# EAGLE board TouScruino-v0 (EAGLE 6.3)
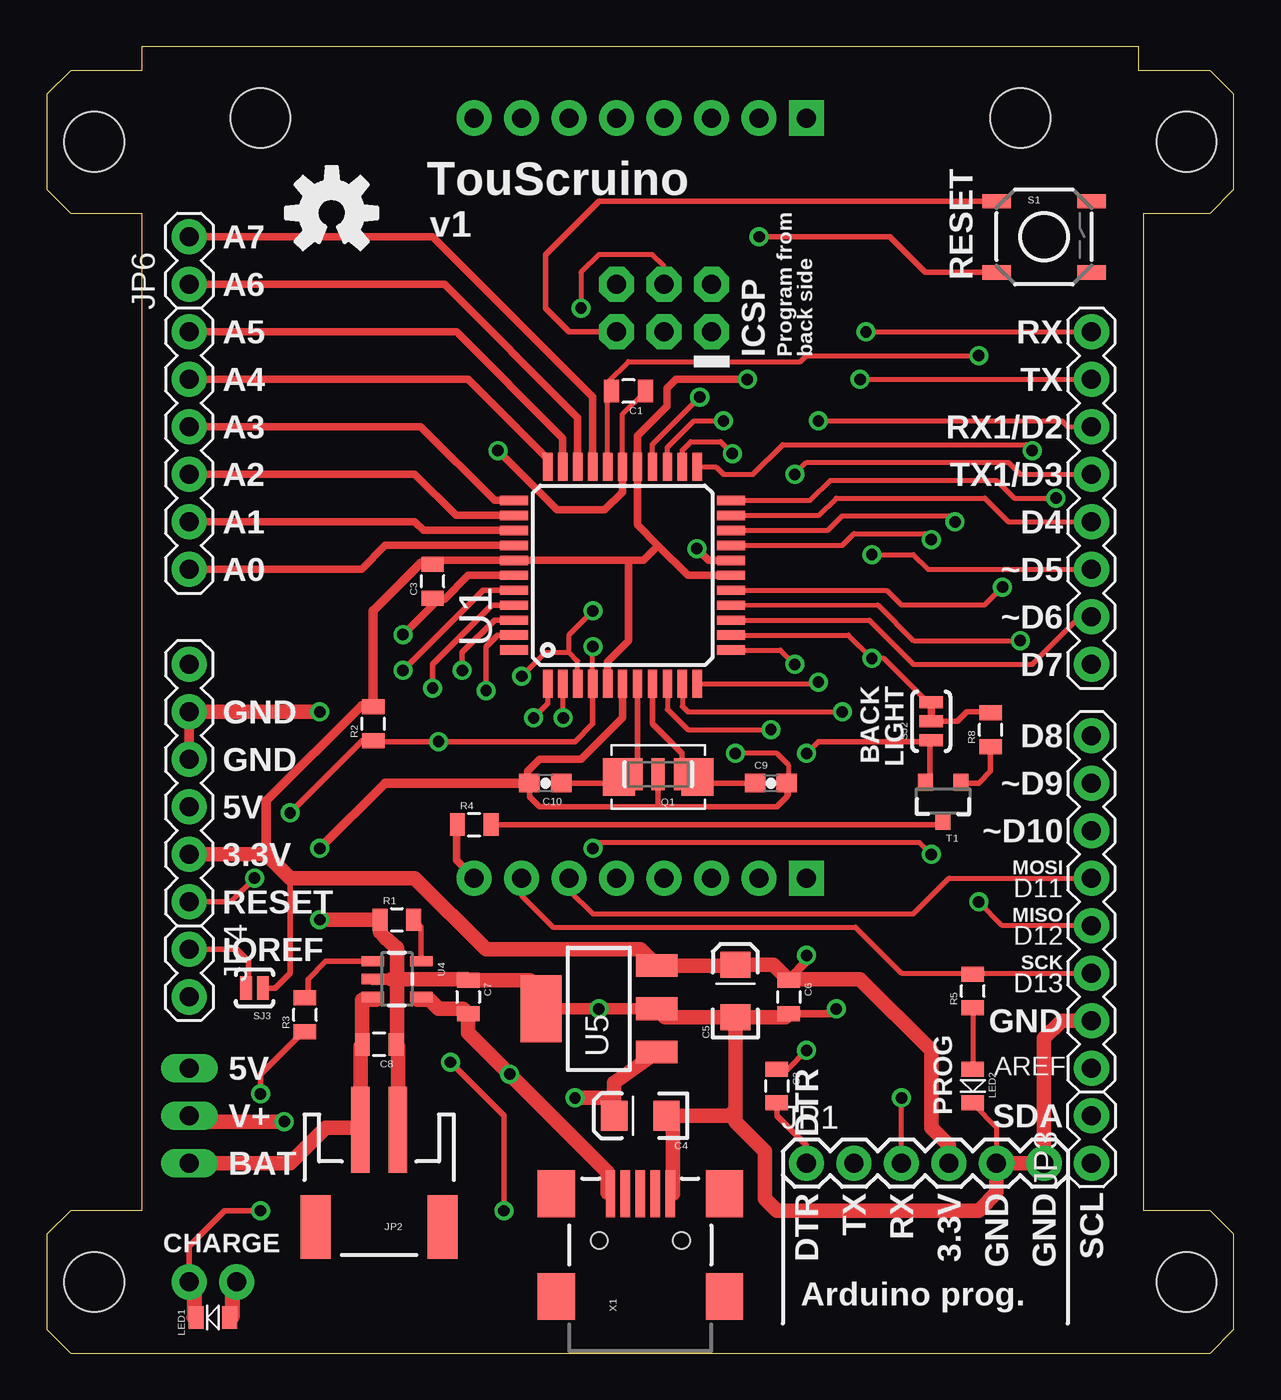
[diagram p0: board, top side]
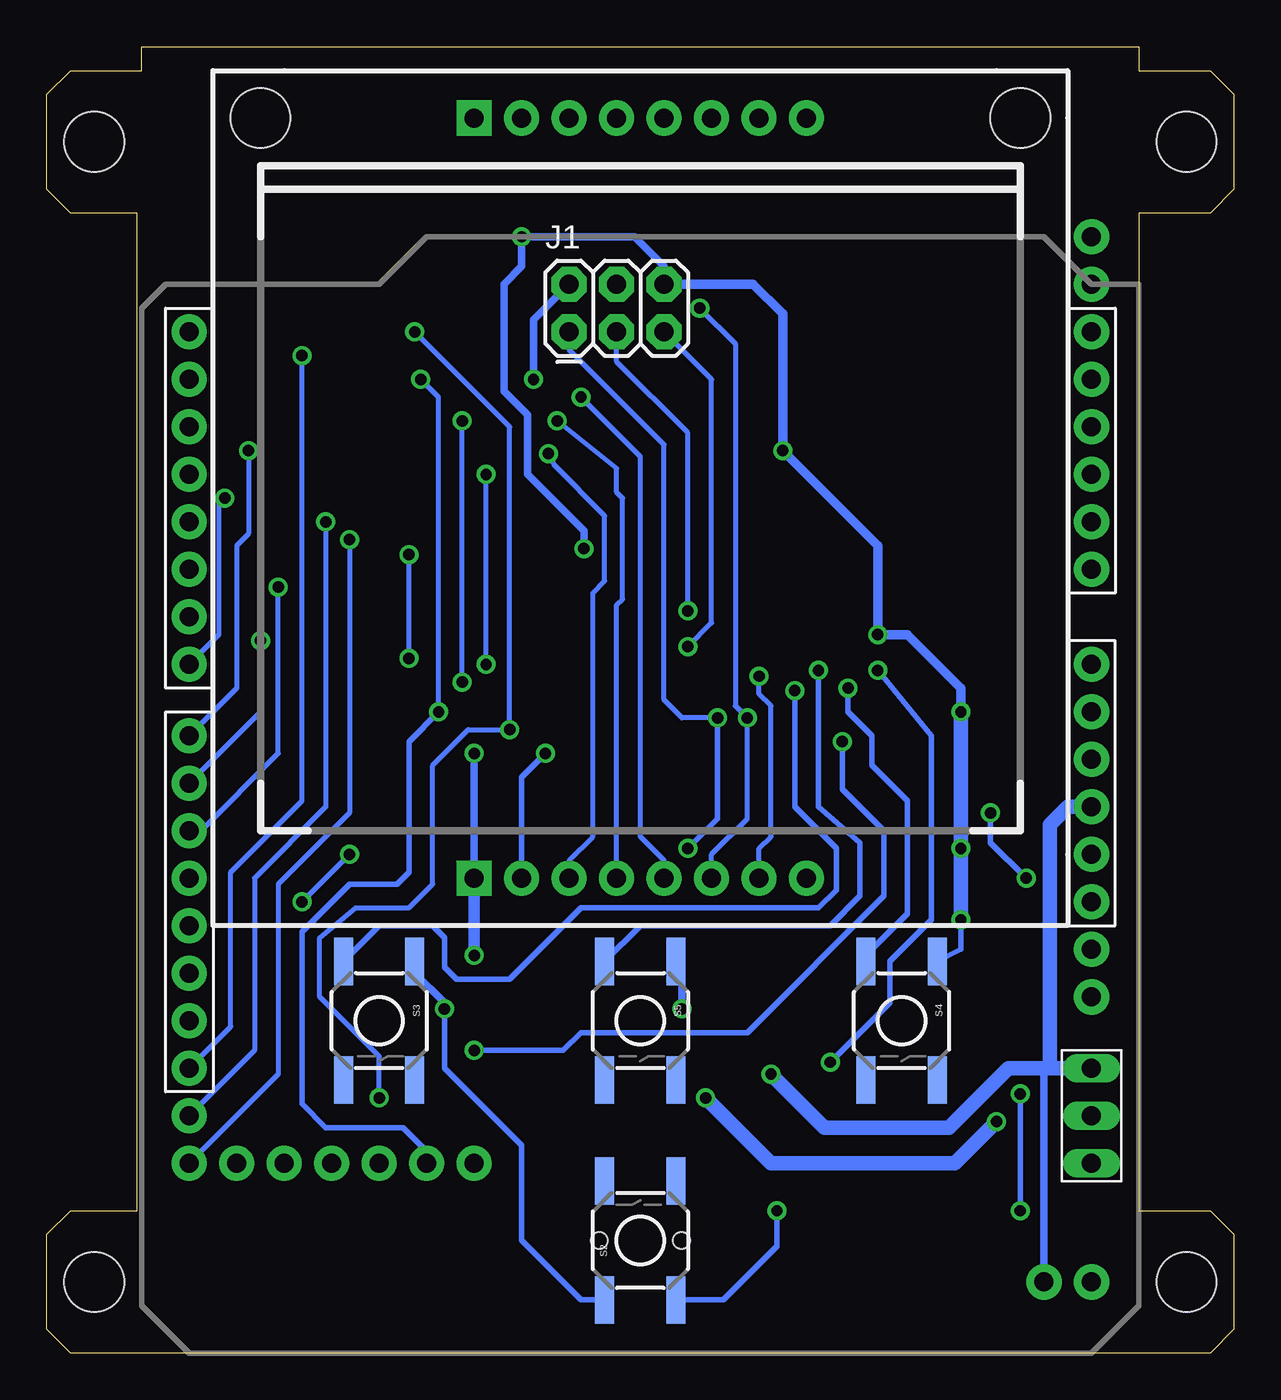
[diagram p1: board, bottom side, seen from below]

Size 63.5 x 69.85 mm. Coordinates in mm from the lower left corner, seen from the top.
Outline: 63.5,1.27 63.5,6.35 62.23,7.62 58.67,7.62 58.67,60.96 62.23,60.96 63.5,62.23 63.5,67.31 62.23,68.58 58.42,68.58 58.42,69.85 5.08,69.85 5.08,68.58 1.27,68.58 0,67.31 0,62.23 1.27,60.96 5.08,60.96 5.08,7.62 1.27,7.62 0,6.35 0,1.27 1.27,0 62.23,0 63.5,1.27
Copper layers (1*16): Top 0.035mm / dielectric 1.5mm / Bottom 0.035mm
Design rules "default": minimum track width 10mil, minimum drill 24mil, track to track 8mil, track to pad 8mil, pad to pad 8mil, via to via 8mil, smd to smd 8mil, copper to edge 40mil, drill to drill 8mil, minimum pad ring 10mil, minimum via ring 8mil, stop-mask expansion 4mil, vias tented up to drill 0mil, thermal gap 10mil
Net classes: 0 default: width 0.203 mm; 1 vcc: width 0.254 mm
Holes 3.2 mm at 2.54,64.77 60.96,64.77 2.54,3.81 60.96,3.81

## Footprints (pad centres in the part's own frame; a part is rotated, then mirrored left to right if it is on the bottom)
0805 = smd 0.8 x 1.2: 1 -0.9,0; 2 0.9,0
EIA3216 = smd 1.4 x 1.6: A 1.4,0; C -1.4,0
0603-CAP = smd 1.1 x 1: 1 -0.85,0; 2 0.85,0
2X3 = drill 1.016 pad 1.88 octagon: 1 0,0; 2 0,2.54; 3 2.54,0; 4 2.54,2.54; 5 5.08,0; 6 5.08,2.54
1X06 = drill 1.016 pad 1.88: 1 0,0; 2 2.54,0; 3 5.08,0; 4 7.62,0; 5 10.16,0; 6 12.7,0
JST-2-SMD = smd 1 x 4.6: 1 -1,-3.7; 2 1,-3.7 | smd 1.6 x 3.4: NC1 -3.4,1.5; NC2 3.4,1.5
1X02 = drill 1.016 pad 1.88: 1 0,0; 2 2.54,0
1X3_LONGPAD = drill 1.016 pad 1.245 long: 1 0,0; 2 -2.54,0; 3 -5.08,0
LED = smd 0.8 x 1.2: A -0.9,0; C 0.9,0 | drill 1.016 pad 1.88: A1 -1.27,-1.905; C1 1.27,-1.905
LED-0805 = smd 0.8 x 1.2: 1 -0.9,0; 2 0.9,0
RESONATOR-SMD = smd 0.7 x 1.7: 1 -1.2,0; 2 0,0; 3 1.2,0
CRYSTAL_5X3.2 = smd 1.7 x 2: 1 2.1,0; 2 -2.1,0
TACTILE_SWITCH_SMD = smd 1.524 x 0.762: 1 -2.54,1.905; 2 2.54,1.905; 3 -2.54,-1.905; 4 2.54,-1.905
TACTILE_SWITCH_SMD' = smd 2.54 x 1.016: 1 -3.175,1.905; 2 3.175,1.905; 3 -3.175,-1.905; 4 3.175,-1.905
SJ_2WAYS_1-2_S = smd 0.635 x 1.27: 1 0.508,0; 2 -0.508,0; 3 -1.524,0
SJ_2S-NO = smd 0.635 x 1.27: 1 -0.45,0; 2 0.45,0
SOT23-3 = smd 0.8 x 0.9: 1 -0.95,-1; 2 0.95,-1; 3 0,1.1
TQFP44 = smd 1.5 x 0.5: 1 -5.8,4; 2 -5.8,3.2; 3 -5.8,2.4; 4 -5.8,1.6; 5 -5.8,0.8; 6 -5.8,0; 7 -5.8,-0.8; 8 -5.8,-1.6; 9 -5.8,-2.4; 10 -5.8,-3.2; 11 -5.8,-4; 23 5.8,-4; 24 5.8,-3.2; 25 5.8,-2.4; 26 5.8,-1.6; 27 5.8,-0.8; 28 5.8,0; 29 5.8,0.8; 30 5.8,1.6; 31 5.8,2.4; 32 5.8,3.2; 33 5.8,4 | smd 0.5 x 1.5: 12 -4,-5.8; 13 -3.2,-5.8; 14 -2.4,-5.8; 15 -1.6,-5.8; 16 -0.8,-5.8; 17 0,-5.8; 18 0.8,-5.8; 19 1.6,-5.8; 20 2.4,-5.8; 21 3.2,-5.8; 22 4,-5.8; 34 4,5.8; 35 3.2,5.8; 36 2.4,5.8; 37 1.6,5.8; 38 0.8,5.8; 39 0,5.8; 40 -0.8,5.8; 41 -1.6,5.8; 42 -2.4,5.8; 43 -3.2,5.8; 44 -4,5.8
ARDUINO_SHIELD = drill 1.016 pad 1.88: 3.3V 33.02,50.8; 5V 30.48,50.8; A0 17.78,50.8; A1 15.24,50.8; A2 12.7,50.8; A3 10.16,50.8; A4 7.62,50.8; A5 5.08,50.8; AREF 44.45,2.54; D2 10.16,2.54; D3 12.7,2.54; D4 15.24,2.54; D5 17.78,2.54; D6 20.32,2.54; D7 22.86,2.54; D8 26.67,2.54; D9 29.21,2.54; D10 31.75,2.54; D11 34.29,2.54; D12 36.83,2.54; D13 39.37,2.54; GND@0 27.94,50.8; GND@1 25.4,50.8; GND@2 41.91,2.54; RES 35.56,50.8; RX 5.08,2.54; TX 7.62,2.54; VIN 22.86,50.8
SOT23-5 = smd 0.55 x 1.2: 1 -0.95,-1.3; 2 0,-1.3; 3 0.95,-1.3; 4 0.95,1.3; 5 -0.95,1.3
SOT223 = smd 1.219 x 2.235: 1 -2.311,-3.099; 2 0,-3.099; 3 2.311,-3.099 | smd 3.6 x 2.2: 4 0,3.099
PCD8544 = drill 1.016 pad 1.88 square: 1 -8.89,-19.05; P1 -8.89,21.59 | drill 1.016 pad 1.88: 2 -6.35,-19.05; 3 -3.81,-19.05; 4 -1.27,-19.05; 5 1.27,-19.05; 6 3.81,-19.05; 7 6.35,-19.05; 8 8.89,-19.05; P2 -6.35,21.59; P3 -3.81,21.59; P4 -1.27,21.59; P5 1.27,21.59; P6 3.81,21.59; P8 8.89,21.59; P17 6.35,21.59 | hole 3.2: -20.32,21.59; 20.32,21.59
USB-MINIB = smd 2.5 x 0.5: D+ 2.5,0; D- 2.5,0.8; GND 2.5,-1.6; ID 2.5,-0.8; VBUS 2.5,1.6 | smd 2.5 x 2: MTN1 -3,4.5; MTN2 2.5,4.5; MTN3 -3,-4.5; MTN4 2.5,-4.5 | hole 0.9: 0,2.2; 0,-2.2

## Placement (x,y rotation side)
C1  0.1uF  [0805]  31.11,51.44 180 top
C2  0.1uF  [0805]  39.05,14.29 270 top
C3  0.1uF  [0805]  20.64,41.27 90 top
C4  10uF  [EIA3216]  31.75,12.7 180 top
C5  10uF  [EIA3216]  36.83,19.37 90 top
C6  0.1uF  [0805]  39.69,19.05 270 top
C7  4.7uF  [0805]  22.54,19.05 270 top
C8  4.7uF  [0805]  17.78,16.51 180 top
C9  18pF  [0603-CAP]  38.73,30.48 0 top
C10  18pF  [0603-CAP]  26.67,30.48 180 top
J1  AVR_ISP  [2X3]  35.56,54.61 0 bottom
JP1  [1X06]  40.64,10.16 0 top
JP2  BAT  [JST-2-SMD]  17.78,8.26 180 top
JP3  I2C  [1X02]  55.88,10.16 90 top
JP4  I2C  [1X02]  7.62,21.59 270 top
JP5  SWITCH  [1X3_LONGPAD]  7.62,10.16 270 bottom
JP6  AN  [1X02]  7.62,57.15 90 top
LED1  Amber  [LED]  8.89,1.91 180 top
LED2  Red  [LED-0805]  49.53,14.29 270 top
Q1  8MHz  [RESONATOR-SMD]  32.7,30.96 180 top
Q3  8MHz  [CRYSTAL_5X3.2]  32.7,30.8 180 top
R1  2K  [0805]  18.73,23.18 0 top
R2  10K  [0805]  17.46,33.66 90 top
R3  10K  [0805]  13.81,18.1 90 top
R4  60  [0805]  22.86,28.26 0 top
R5  1K  [0805]  49.53,19.37 90 top
R8  1K  [0805]  50.48,33.34 90 top
S1  [TACTILE_SWITCH_SMD]  53.34,59.69 0 top
S2  ESC  [TACTILE_SWITCH_SMD']  31.75,6.03 90 bottom
S3  LEFT  [TACTILE_SWITCH_SMD']  45.72,17.78 270 bottom
S4  RIGHT  [TACTILE_SWITCH_SMD']  17.78,17.78 270 bottom
S5  MID  [TACTILE_SWITCH_SMD']  31.75,17.78 270 bottom
SJ2  [SJ_2WAYS_1-2_S]  47.31,34.29 90 top
SJ3  [SJ_2S-NO]  11.11,19.53 180 top
T1  MMBT3906  [SOT23-3]  47.94,29.53 180 top
U1  ATMEGA1284P  [TQFP44]  30.8,41.59 90 top
U3  ARDUINO_SHIELD  [ARDUINO_SHIELD]  58.42,59.69 270 bottom
U4  MCP73831  [SOT23-5]  18.73,20 270 top
U5  MIC5209-3.3YS  [SOT223]  29.53,18.41 90 top
U$3  OSHW-LOGOM  [OSHW-LOGO-M]  15.24,60.96 0 top
U$4  PCD8544  [PCD8544]  31.75,44.45 0 bottom
U$5  OSHW-LOGOM  [OSHW-LOGO-M]  15.24,60.96 0 top
X1  USBSMD  [USB-MINIB]  31.75,6.03 90 top

## Library data of the parts
C1-C10 J1 JP1 JP2 Q1 R1-R5 R8 S1 SJ3 U4 U$3 U$5 X1 = SparkFun
JP3-JP6 LED1 LED2 Q3 S2-S5 SJ2 T1 U1 U3 U5 U$4 = wibauxl

## Nets
3.3V: C3.2 C5.A C6.1 J1.2 JP1.4 R2.2 SJ2.3 SJ3.1 T1.2 U1.5 U1.17 U1.27 U1.38 U3.3.3V U5.3 U$4.1
A0/D24: U1.37 U3.A0
A1/D25: U1.36 U3.A1
A2/D26: U1.35 U3.A2
A3/D27: U1.34 U3.A3
A4/D28: U1.33 U3.A4
A5/D29: U1.32 U3.A5
A6/D30: JP6.1 U1.31
A7/D31: JP6.2 U1.30
AREF: C1.2 U1.29 U3.AREF
BL_CMD: R8.2 SJ2.2
D0/RX: JP1.3 U1.9 U3.RX
D1/TX: JP1.2 U1.10 U3.TX
D2/RX1: U1.11 U3.D2
D3/TX1: U1.12 U3.D3
D4: U1.21 U3.D4
D5/PWM1: SJ2.1 U1.13 U3.D5
D6/PWM2: U1.14 U3.D6
D7: U1.22 U3.D7
D8: U1.23 U3.D8
D9/PWM3: U1.15 U3.D9
D10/PWM4: U1.16 U3.D10
D11/MOSI: J1.4 U1.1 U3.D11 U$4.6
D12/MISO: J1.1 U1.2 U3.D12
D13/SCK: J1.3 R5.2 U1.3 U3.D13 U$4.7
D14: S2.3 U1.40
D15: S4.3 U1.41
D16: S5.3 U1.42
D17: S3.3 U1.43
D19/SCL: JP3.1 U1.19
D20/SDA: JP3.2 U1.20
D21: U1.24 U$4.3
D22: U1.25 U$4.4
D23: U1.26 U$4.5
DTR: C2.2 JP1.1
GND [vcc]: C1.1 C3.1 C4.C C5.C C6.2 C7.1 C8.1 C9.2 C10.2 J1.6 JP1.5 JP1.6 JP2.1 LED2.2 Q1.2 R1.1 S1.3 S2.1 S3.1 S4.1 S5.1 U1.6 U1.18 U1.28 U1.39 U3.GND@0 U3.GND@1 U3.GND@2 U4.2 U5.2 U5.4 U$4.2 X1.GND
IOREF: JP4.1 SJ3.2
N$1: C9.1 Q1.1 Q3.2 U1.8
N$2: C10.1 Q1.3 Q3.1 U1.7
N$5: LED2.1 R5.1
N$8: LED1.C1 R3.1
N$12: R3.2 U4.1
N$13: R1.2 U4.5
N$17: R4.2 T1.3
N$27: R8.1 T1.1
POW_BL: R4.1 U$4.8
RES: C2.1 J1.5 R2.1 S1.1 U1.4 U3.RES
V+: C4.A JP5.2 U5.1
VBAT: C8.2 JP2.2 JP5.1 U4.3
VUSB: C7.2 JP5.3 LED1.A1 U3.5V U4.4 X1.VBUS

## Tracks (layer width: path | path; a pad name or v marks a point on that pad's centre or on a via)
3.3V  (via drill 0.61)
  Top 0.305: R2.2 17.52,34.55 17.46,34.61 | 47.24,32.7 41.27,32.7 v40.64,32.07 | SJ3.1 12.22,19.53 13.02,20.32 13.02,25.4 | 47.24,32.7 47.24,30.78 T1.2 | 47.24,32.7 SJ2.3
  Top 0.406: v37.47,52.07 33.66,52.07 33.18,51.59 33.18,50.64 31.6,49.06 U1.27 31.6,44.28 32.7,43.18 | 32.7,43.18 34.29,41.59 U1.17 | 31.11,42.39 U1.38 21.17,42.39 C3.2 | 31.11,42.39 31.91,42.39 32.7,43.18 | U1.5 30,36.98 31.11,38.1 31.11,42.39
  Top 0.508: 11.75,26.67 11.75,29.53 16.83,34.61 17.46,34.61 17.46,39.69 20,42.23 20.9,42.23 C3.2 | v40.64,21.27 40.64,20.95 39.69,20 C6.1 39.74,20
  Top 0.61: 36.79,20.73 C5.A
  Top 0.762: 36.79,20.73 U5.3 31.76,21.59 23.5,21.59 19.68,25.4 13.02,25.4 11.75,26.67 U3.3.3V | C5.A 38.87,20.77 C6.1 | JP1.4 48.26,11.11 47.31,12.06 47.31,16.19 43.5,20 39.74,20
  Bottom 0.406: v37.47,52.07 37.47,55.24 J1.2 | U$4.1 v40.64,32.07
  Bottom 0.61: v40.64,21.27 U$4.1
A0/D24
  Top 0.406: U1.37 18.11,43.19 16.83,41.91 U3.A0
A1/D25
  Top 0.406: U1.36 20.14,43.99 19.68,44.45 U3.A1
A2/D26
  Top 0.406: U1.35 21.88,44.79 19.68,46.99 U3.A2
A3/D27
  Top 0.406: U3.A3 20,49.53 23.94,45.59 U1.34
A4/D28
  Top 0.406: U1.33 26.8,47.81 22.54,52.07 U3.A4
A5/D29
  Top 0.406: U1.32 27.6,48.92 21.91,54.61 U3.A5
A6/D30
  Top 0.406: U1.31 28.4,50.02 21.27,57.15 JP6.1
A7/D31
  Top 0.406: U1.30 29.2,51.13 20.64,59.69 JP6.2
AREF  (via drill 0.61)
  Top 0.254: C1.2 30,51.22 U1.29 30,51.91 31.11,53.02 40.32,53.02 40.64,53.34 v49.85,53.34
  Bottom 0.254: U3.AREF 53.66,17.46 53.66,25.72 49.85,29.53 v49.85,53.34
BL_CMD
  Top 0.305: SJ2.2 48.7,33.78 49.21,34.29 50.43,34.29 R8.2
D0/RX  (via drill 0.61)
  Top 0.254: U1.9 33.2,34.43 34.29,33.34 v38.73,33.34 | v43.81,54.61 U3.RX | JP1.3 v45.72,13.65
  Bottom 0.254: v43.81,54.61 38.73,49.53 v38.73,33.34 40.96,33.34 42.86,31.43 42.86,25.08 44.13,23.81 46.99,23.81 48.9,22.23 48.9,19.05 45.72,15.88 v45.72,13.65
D1/TX  (via drill 0.61)
  Top 0.254: U1.10 34,34.58 34.29,34.29 v42.55,34.29 | v43.5,52.07 U3.TX
  Bottom 0.254: v42.55,34.29 42.55,51.12 v43.5,52.07
  Bottom 0.305: JP1.2 43.18,10.79 44.45,12.06 48.58,12.06 49.85,13.34 49.85,22.54 47.31,25.08 44.77,25.08 44.13,25.72 44.13,32.7 v42.55,34.29
D2/RX1  (via drill 0.61)
  Top 0.254: U1.11 41.19,35.79 v41.27,35.88 | v41.27,49.85 54.29,49.85 54.61,49.53 U3.D2
  Bottom 0.254: v41.27,35.88 v41.27,49.85
D3/TX1  (via drill 0.61)
  Top 0.254: U1.12 39.24,37.59 v40.01,36.83 | v40.01,46.99 40.64,47.62 51.44,47.62 52.07,46.99 U3.D3
  Bottom 0.254: v40.01,36.83 v40.01,46.99
D4
  Top 0.254: U1.21 41.3,44.79 42.23,45.72 50.16,45.72 51.44,44.45 U3.D4
D5/PWM1  (via drill 0.61)
  Top 0.254: U1.13 42.89,38.39 v44.13,37.15 44.77,37.15 46.99,34.92 | v44.13,42.7 46.35,42.7 47.15,41.91 U3.D5
  Top 0.305: 46.99,34.92 47.18,34.92 SJ2.1
  Bottom 0.254: v44.13,37.15 v44.13,42.7
D6/PWM2
  Top 0.254: U1.14 43.99,39.19 46.35,36.83 52.7,36.83 55.24,39.37 U3.D6
D7  (via drill 0.61)
  Top 0.254: U1.22 40.83,45.59 41.91,46.67 50.8,46.67 51.75,45.72 v53.98,45.72
  Bottom 0.254: v53.98,45.72 54.29,45.4 54.29,38.42 U3.D7
D8  (via drill 0.61)
  Top 0.254: U1.23 35.79,47.39 36.2,46.99 37.78,46.99 39.37,48.58 52.39,48.58 v52.7,48.26
  Bottom 0.254: v52.7,48.26 52.7,43.81 53.34,43.18 53.34,35.56 U3.D8
D9/PWM3  (via drill 0.61)
  Top 0.254: U1.15 44.45,40.01 46.35,38.1 v52.07,38.1 51.75,38.1
  Bottom 0.254: v52.07,38.1 52.07,34.29 U3.D9
D10/PWM4  (via drill 0.61)
  Top 0.254: U1.16 44.93,40.79 45.72,40.01 50.16,40.01 v51.12,40.96
  Bottom 0.254: U3.D10 55.24,27.94 51.12,32.07 v51.12,40.96
D11/MOSI  (via drill 0.61)
  Top 0.254: U1.1 26.8,34.73 v26.04,33.97 | U$4.6 27.94,24.77 29.21,23.5 46.35,23.5 48.26,25.4 U3.D11 | J1.4 33.02,58.1 32.38,58.74 29.53,58.74 28.57,57.78 v28.57,55.88
  Bottom 0.254: U$4.6 27.94,26.67 26.04,28.57 v26.04,33.97 26.67,34.61 26.67,53.98 v28.57,55.88
D12/MISO  (via drill 0.61)
  Top 0.254: 27.6,34 27.6,33.95 | U3.D12 51.12,22.86 v49.85,24.13 | v47.31,26.67 46.67,27.3 29.53,27.3 v29.21,26.99 | U1.2 27.6,34 | 27.6,34 v27.62,33.97
  Bottom 0.254: v49.85,24.13 v47.31,26.67 | v29.21,26.99 27.62,28.57 | v27.62,33.97 29.53,33.97 30.48,34.92 30.48,48.58 35.56,53.66 J1.1
  Bottom 0.305: 27.62,28.57 v27.62,33.97
D13/SCK  (via drill 0.61)
  Top 0.254: v25.4,36.2 26.67,37.47 27.94,37.47 | U1.3 28.4,37.01 27.94,37.47 | U$4.7 25.4,24.45 27.07,22.78 43.26,22.78 45.72,20.32 49.53,20.32 | 49.53,20.32 U3.D13 | R5.2 49.53,20.32 | 27.94,37.47 27.94,38.42 v29.21,39.69
  Bottom 0.254: U$4.7 25.4,26.99 24.77,27.62 24.77,34.61 25.4,35.24 v25.4,36.2 | v29.21,39.69 29.21,49.21 33.02,53.02 J1.3
D14  (via drill 0.61)
  Top 0.305: v24.45,7.62 24.45,12.7 v21.59,15.56 | U1.40 23.33,40.79 v19.05,36.51
  Bottom 0.305: v21.59,15.56 18.41,18.73 18.41,20.95 16.19,23.18 16.19,33.02 v19.05,36.51 | S2.3 27.3,2.86 24.45,5.71 v24.45,7.62
D15  (via drill 0.61)
  Top 0.305: U1.41 23.8,39.99 20.64,36.83 v20.64,35.56
  Bottom 0.305: S4.3 19.68,21.27 17.46,23.5 17.46,29.53 19.37,31.43 19.37,33.02 20.64,34.29 v20.64,35.56
D16  (via drill 0.61)
  Top 0.305: U1.42 23.95,39.19 22.23,37.47 v22.23,36.51
  Bottom 0.305: 33.66,20.64 S5.3 31.75,22.86 21.59,22.86 20,24.45 20,27.3 22.23,29.21 v22.23,36.51
D17  (via drill 0.61)
  Top 0.305: U1.43 24.11,38.39 23.5,37.78 v23.5,35.42
  Bottom 0.305: S3.3 45.72,22.86 42.86,22.86 42.23,22.23 42.23,20.64 41.59,20 38.73,20 34.92,23.81 22.23,23.81 21.27,24.77 21.27,26.99 23.5,29.21 v23.5,35.42
D19/SCL  (via drill 0.61)
  Top 0.254: U1.19 42.56,43.19 43.18,43.81 46.99,43.81 v47.31,43.5
  Bottom 0.254: v47.31,43.5 47.31,28.89 51.12,25.08 51.12,14.92 JP3.1
D20/SDA  (via drill 0.61)
  Top 0.254: U1.20 41.77,43.99 42.55,44.77 48.58,44.77 v48.58,44.45
  Bottom 0.254: v48.58,44.45 48.58,29.21 52.39,25.4 52.39,16.19 JP3.2
D21  (via drill 0.61)
  Top 0.254: U1.24 34,48.28 34.45,48.74 36.04,48.74 v36.67,48.1
  Bottom 0.254: U$4.3 35.56,26.35 34.29,27.62 34.29,40.64 33.66,41.27 33.66,44.77 36.35,47.47 v36.67,48.1
D22  (via drill 0.61)
  Top 0.254: U1.25 33.2,48.44 34.61,49.85 v36.2,49.85
  Bottom 0.254: 35.88,49.85 v36.2,49.85 33.02,47.31 33.02,46.04 32.7,45.72 32.7,40.32 33.02,40.01 U$4.4
D23  (via drill 0.61)
  Top 0.254: U1.26 32.4,48.59 v34.92,51.12
  Bottom 0.254: U$4.5 30.48,26.35 31.75,27.62 31.75,47.94 v34.92,51.12
DTR
  Top 0.305: JP1.1 40.64,11.11 39.05,12.7 C2.2
GND  (via drill 0.61)
  Top 0.254: U1.28 30.8,50.22 C1.1 | LED2.2 49.53,13.34 50.8,12.06 JP1.5 | 39.95,30.84 C9.2 | 39.59,29.74 39.69,29.84 39.69,31.43 39.05,32.07 v36.83,32.07
  Top 0.305: C10.2 25.82,29.74 26.35,29.21 32.7,29.21 | 32.7,29.21 Q1.2 | C9.2 39.59,29.74 39.05,29.21 32.7,29.21 | 21.01,40.32 20.95,40.32 | S1.3 46.99,57.78 45.09,59.69 v38.1,59.69
  Top 0.406: U1.39 22.54,41.59 21.27,40.32 21.01,40.32 C3.1 20.69,40.06 v19.05,38.42 | U1.28 30.8,46.04 29.84,45.09 27.3,45.09 v24.13,48.26 | U1.6 30.8,33.97 28.57,31.75 26.35,31.75 25.72,31.11 25.72,30.48 C10.2 | U1.18 35.4,42.39 v34.77,43.02 | C6.2 41.86,18.15 v42.23,18.41 | 27.94,18.41 v29.53,18.41 | JP2.1 18.73,12.06
  Top 0.508: X1.GND 33.5,8.53 | U3.GND@1 U3.GND@0 | v14.61,26.99 18.1,30.48 C10.2
  Top 0.61: 18.78,16.41 C8.1 | U4.2 18.41,20 | U5.4 27.94,18.41 U5.2
  Top 0.762: JP2.1 18.78,16.41 | U5.4 25.85,19.95 C7.1 22.49,20 18.73,20 | 33.5,8.53 33.5,12.35 C4.C 36.51,12.7 36.83,13.02 | 36.83,13.02 C5.C | U3.GND@1 v14.61,34.29 | U3.GND@2 54.29,17.78 53.34,16.83 JP1.6 JP1.5 50.8,8.57 49.85,7.62 39.05,7.62 38.42,8.26 38.42,10.79 36.83,12.38 36.83,13.02 | C5.C 39.51,17.97 C6.2 | C5.C 33.07,17.97 U5.2 | v14.61,23.18 R1.1 17.83,22.52 18.1,22.23 18.73,21.64 18.73,20 | 18.41,20 18.73,20 | 18.73,20 18.73,16.56 C8.1
  Bottom 0.305: U$4.2 38.1,30.8 v36.83,32.07 | S4.1 14.61,21.59 v14.61,26.99 | S2.1 34.92,2.86 38.1,6.03 38.1,11.11 42.23,15.24 v42.23,18.41
  Bottom 0.406: J1.6 30.48,58.1 32.07,59.69 v38.1,59.69 38.1,58.1 39.05,57.15 39.05,51.44 37.78,50.16 37.78,46.99 34.77,43.97 v34.77,43.02 | v42.23,18.41 42.23,18.73 43.81,20.32 S3.1 | S5.1 29.53,20 v29.53,18.41
  Bottom 0.508: J1.6 25.72,57.15 24.13,55.56 v24.13,48.26 19.05,43.18 v19.05,38.42 17.46,38.42 14.61,35.56 v14.61,34.29
  Bottom 0.762: v14.61,34.29 v14.61,26.99 v14.61,23.18
IOREF
  Top 0.305: JP4.1 10.16,21.59 10.79,20.95 10.79,19.66 SJ3.2
N$1
  Top 0.305: C9.1 35.12,30.48 Q3.2 34.06,30.8 Q1.1 33.97,31.03 33.97,32.07 32.4,33.64 U1.8
N$2
  Top 0.305: C10.1 30.29,30.48 | Q3.1 31.34,30.8 Q1.3 31.6,31.05 U1.7
  Top 0.406: 30.29,30.48 Q3.1
N$5
  Top 0.254: R5.1 LED2.1
N$8  (via drill 0.61)
  Top 0.305: LED1.C1 7.62,5.71 9.53,7.62 v11.43,7.62 | v11.43,13.86 11.43,14.92 13.65,17.14 R3.1
  Bottom 0.305: v11.43,7.62 v11.43,13.86
N$12
  Top 0.305: U4.1 14.92,20.95 13.97,20 13.97,18.84 R3.2
N$13
  Top 0.305: U4.5 20.03,22.78 R1.2
N$17
  Top 0.305: R4.2 48.09,28.26 T1.3
N$27
  Top 0.305: R8.1 50.48,31.11 49.85,30.48 48.94,30.48 T1.1
POW_BL
  Top 0.305: 21.86,28.2 21.86,28.05 R4.1
  Top 0.406: U$4.8 21.91,26.35 21.91,27.94 21.86,28.2
RES  (via drill 0.61)
  Top 0.254: U1.4 29.2,37.45 v29.21,37.78
  Top 0.305: U1.4 29.2,33.64 28.26,32.7 v20.95,32.7 17.52,32.7 R2.1 16.88,32.76 v13.02,28.89 | U3.RES 9.84,24.13 v11.11,25.4 | J1.5 27.94,54.61 26.67,55.88 26.67,58.74 29.53,61.59 S1.1 | C2.1 39.63,15.19 v40.64,16.19
  Bottom 0.254: v29.21,37.78 27.94,39.05 27.94,52.07 J1.5
  Bottom 0.305: v11.11,25.4 13.02,27.3 v13.02,28.89 | v40.64,16.19 35.88,16.19 34.92,17.14 26.04,17.14 18.73,24.45 18.73,27.94 20.95,30.16 v20.95,32.7
V+  (via drill 0.61)
  Top 0.762: C4.A 30.35,13.65 | 30.35,13.65 30.35,14.46 U5.1 | JP5.2 7.94,12.38 v12.7,12.38 | v28.26,13.65 30.35,13.65
  Bottom 0.762: v12.7,12.38 14.92,10.16 24.77,10.16 v28.26,13.65
VBAT
  Top 0.254: U4.3 17.43,18.76 17.62,18.89 | 16.87,18.89 16.88,18.74
  Top 0.61: 16.67,12.06 JP2.2 | 16.78,16.41 C8.2
  Top 0.762: JP5.1 13.02,10.16 14.92,12.06 16.67,12.06 | JP2.2 16.78,16.41 | C8.2 16.88,18.74 | 17.62,18.89 16.87,18.89
VUSB  (via drill 0.61)
  Top 0.254: U4.4 20.03,18.76 19.84,18.89
  Top 0.508: X1.VBUS 30,8.57
  Top 0.762: 30,8.57 30,9.68 v24.77,14.92 22.54,17.14 C7.2 22.28,18.41 20.95,18.41 20.48,18.89 19.84,18.89
  Bottom 0.406: LED1.A1 10.16,14.92 9.84,15.24
  Bottom 0.762: JP5.3 9.84,15.24 | 9.84,15.24 12.06,15.24 15.24,12.06 21.91,12.06 v24.77,14.92 | U3.5V 8.89,29.21 9.84,28.26 9.84,15.24

## Text on the board
tPlace: TouScruino | v1 | A7 | A6 | RESET | RX | A5 | ICSP | Program from / back side | TX | A4 | RX1/D2 | A3 | TX1/D3 | A2 | D4 | A1 | ~D5 | A0 | ~D6 | D7 | BACK / LIGHT | GND | D8 | GND | ~D9 | 5V | ~D10 | 3.3V | MOSI | D11 | MISO | RESET | D12 | IOREF | SCK | D13 | D13 | GND | AREF | 5V | DTR | PROG | SDA | V+ | BAT | DTR | TX | RX | 3.3V | GND | GND | SCL | CHARGE | Arduino prog.